# EAGLE board Master_Micro_Circuit_Manual (EAGLE 9.3.0)
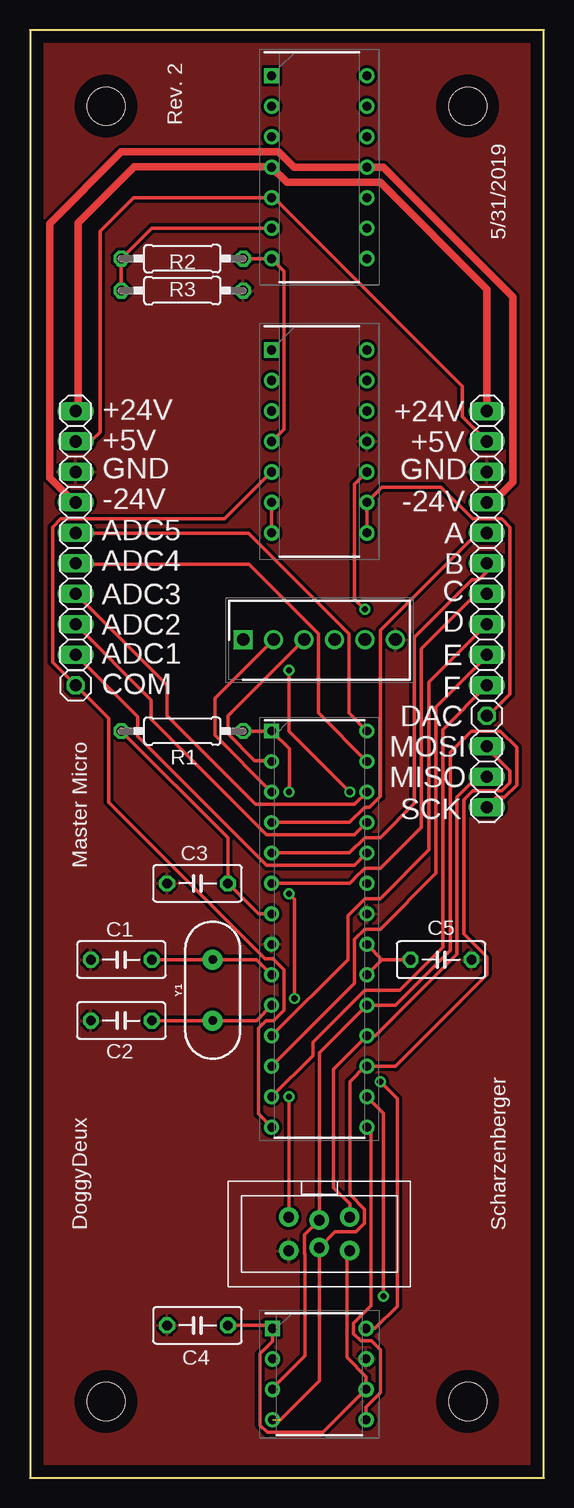
[diagram p0: board, top side]
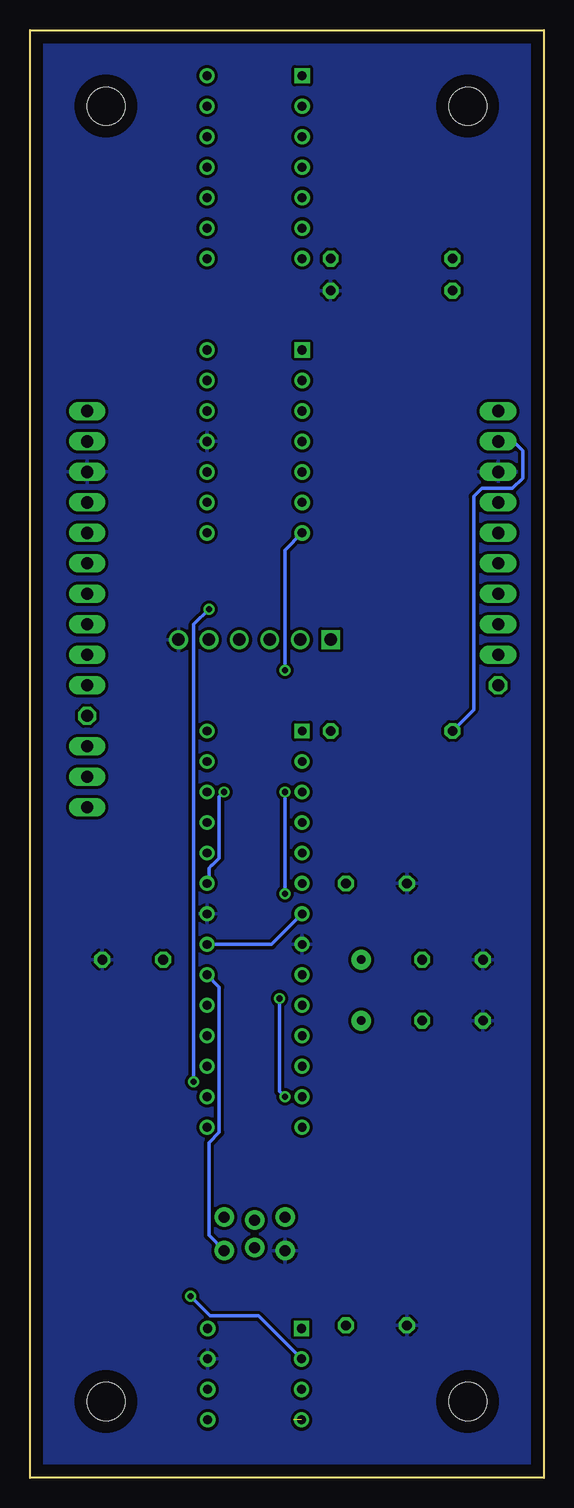
[diagram p1: board, bottom side, seen from below]

Size 42.86 x 120.65 mm. Coordinates in mm from the lower left corner, seen from the top.
Outline: 0,0 42.86,0 42.86,120.65 0,120.65 0,0
Copper layers (1*16): Top 0.035mm / dielectric 1.5mm / Bottom 0.035mm
Design rules "default": minimum track width 6mil, minimum drill 0.35mm, track to track 6mil, track to pad 6mil, pad to pad 6mil, via to via 6mil, smd to smd 6mil, copper to edge 40mil, drill to drill 6mil, minimum pad ring 10mil, minimum via ring 8mil, stop-mask expansion 4mil, vias tented up to drill 0mil, thermal gap 10mil
Net classes: 0 default: width 0.305 mm, drill 0.508 mm, clearance 0.254 mm
Holes 3.17 mm at 6.35,6.35 36.51,6.35 6.35,114.3 36.51,114.3

## Footprints (pad centres in the part's own frame; a part is rotated, then mirrored left to right if it is on the bottom)
C050-030X075 = drill 0.813 octagon: 1 -2.54,0; 2 2.54,0
DIP794W53P254L3467H457Q28N = drill 0.733 pad 1.133 square: 1 -3.969,16.51 | drill 0.733 pad 1.133: 2 -3.969,13.97; 3 -3.969,11.43; 4 -3.969,8.89; 5 -3.969,6.35; 6 -3.969,3.81; 7 -3.969,1.27; 8 -3.969,-1.27; 9 -3.969,-3.81; 10 -3.969,-6.35; 11 -3.969,-8.89; 12 -3.969,-11.43; 13 -3.969,-13.97; 14 -3.969,-16.51; 15 3.969,-16.51; 16 3.969,-13.97; 17 3.969,-11.43; 18 3.969,-8.89; 19 3.969,-6.35; 20 3.969,-3.81; 21 3.969,-1.27; 22 3.969,1.27; 23 3.969,3.81; 24 3.969,6.35; 25 3.969,8.89; 26 3.969,11.43; 27 3.969,13.97; 28 3.969,16.51
DIP794W56P254L1905H533Q14N = drill 0.759 pad 1.159 square: 1 -3.969,7.62 | drill 0.759 pad 1.159: 2 -3.969,5.08; 3 -3.969,2.54; 4 -3.969,0; 5 -3.969,-2.54; 6 -3.969,-5.08; 7 -3.969,-7.62; 8 3.969,-7.62; 9 3.969,-5.08; 10 3.969,-2.54; 11 3.969,0; 12 3.969,2.54; 13 3.969,5.08; 14 3.969,7.62
DIP781W56P254L950H533Q8N = drill 0.759 pad 1.159 square: 1 -3.905,3.81 | drill 0.759 pad 1.159: 2 -3.905,1.27; 3 -3.905,-1.27; 4 -3.905,-3.81; 5 3.905,-3.81; 6 3.905,-1.27; 7 3.905,1.27; 8 3.905,3.81
AVRISP-BOX = drill 0.9 pad 1.626: 1 -1.397,2.54; 2 1.397,2.54; 3 -1.143,0; 4 1.143,0; 5 -1.397,-2.54; 6 1.397,-2.54
SHDR6W87P0X254_1X6_1509X635X10 = drill 1.05 pad 1.575 square: 1 0,0 | drill 1.05 pad 1.575: 2 2.54,0; 3 5.08,0; 4 7.62,0; 5 10.16,0; 6 12.7,0
1X04 = drill 1.016 long: 1 -3.81,0; 2 -1.27,0; 3 1.27,0; 4 3.81,0
1X05 = drill 1.016 long: 1 -5.08,0; 2 -2.54,0; 3 0,0; 4 2.54,0; 5 5.08,0
1X01 = drill 1.016 octagon: 1 0,0
1X06 = drill 1.016 long: 1 -6.35,0; 2 -3.81,0; 3 -1.27,0; 4 1.27,0; 5 3.81,0; 6 6.35,0
1X03 = drill 1.016 long: 1 -2.54,0; 2 0,0; 3 2.54,0
0207/10 = drill 0.813 octagon: 1 -5.08,0; 2 5.08,0
HC49US = drill 0.7 pad 1.651: 1 -2.54,0; 2 2.54,0

## Placement (x,y rotation side)
C1  [C050-030X075]  7.62,43.18 180 top
C2  [C050-030X075]  7.62,38.1 180 top
C3  [C050-030X075]  13.97,49.53 180 top
C4  [C050-030X075]  13.97,12.7 180 top
C5  [C050-030X075]  34.29,43.18 0 top
IC1  ATMEGA88A-PU  [DIP794W53P254L3467H457Q28N]  24.13,45.72 0 top
IC2  LM324N  [DIP794W56P254L1905H533Q14N]  24.13,109.22 0 top
IC3  LM324N  [DIP794W56P254L1905H533Q14N]  24.13,86.36 0 top
IC4  MCP4921-E_P  [DIP781W56P254L950H533Q8N]  24.13,8.64 0 top
ISP1  AVRISP-BOX  [AVRISP-BOX]  24.13,20.32 270 top
J1  22-23-2061  [SHDR6W87P0X254_1X6_1509X635X10]  17.78,69.85 0 top
JP1  [1X04]  3.81,85.09 270 top
JP2  [1X05]  3.81,73.66 270 top
JP3  [1X01]  3.81,66.04 0 top
JP4  [1X04]  38.1,85.09 270 top
JP5  [1X06]  38.1,72.39 270 top
JP6  [1X01]  38.1,63.5 0 top
JP7  [1X03]  38.1,58.42 270 top
R1  [0207/10]  12.7,62.23 0 top
R2  [0207/10]  12.7,98.93 0 top
R3  [0207/10]  12.7,101.6 0 top
Y1  16MHz  [HC49US]  15.24,40.64 90 top

## Library data of the parts
C1-C5 ISP1 = adafruit
IC1 = SamacSys_Parts; DESCRIPTION: ATMEGA88A-PU, 8 bit AVR Microcontroller 20MHz 512 B, 8 kB Flash, 1 kB RAM, I2C 28-Pin PDIP; HEIGHT: 4.572mm; MANUFACTURER_NAME: Microchip; MANUFACTURER_PART_NUMBER: ATMEGA88A-PU; MOUSER_PART_NUMBER: 556-ATMEGA88A-PU
IC2 IC3 = SamacSys_Parts; DESCRIPTION: OP Amp Quad GP 16V/32V 14-Pin PDIP Texas Instruments LM324N, Quad Op Amp, 1.2MHz, 5 28 V, 14-Pin PDIP; HEIGHT: 5.334mm; MANUFACTURER_NAME: Texas Instruments; MANUFACTURER_PART_NUMBER: LM324N; MOUSER_PART_NUMBER: 595-LM324N
IC4 = SamacSys_Parts; DESCRIPTION: Microchip MCP4921-E/P, 12 bit Serial DAC, 8-Pin PDIP; HEIGHT: 5.334mm; MANUFACTURER_NAME: Microchip; MANUFACTURER_PART_NUMBER: MCP4921-E/P; MOUSER_PART_NUMBER: 579-MCP4921-E/P
J1 = SamacSys_Parts; DESCRIPTION: 2.54mm,header,KK,vert,Sn,frictn lock,6w Molex KK 254 Series, Series Number 6373, 2.54mm Pitch 6 Way 1 Row Straight PCB Header, Through Hole, Solder Termination; HEIGHT: 10.67mm; MANUFACTURER_NAME: Molex; MANUFACTURER_PART_NUMBER: 22-23-2061; MOUSER_PART_NUMBER: 538-22-23-2061
JP1-JP7 = pinhead
R1-R3 = rcl; SPICEPREFIX: R
Y1 = SparkFun-Clocks; PROD_ID: XTAL-08181; SF_ID: COM-00536

## Nets
+5V: C3.1 C4.1 C5.1 IC1.7 IC1.20 IC1.21 IC2.5 IC4.1 IC4.6 ISP1.2 JP1.2 JP4.2 R1.1
+24V: IC2.4 JP1.1 JP4.1
-24V: IC2.11 JP1.4 JP4.4
A: IC1.4 JP5.1
ADC: IC1.23 IC3.6 IC3.7
B: IC1.5 JP5.2
C: IC1.6 JP5.3
CS: IC1.16 IC4.2
D: IC1.11 JP5.4
DAC: IC3.10 IC4.8
DEMUX_COM: IC3.8 IC3.9 JP6.1
E: IC1.12 JP5.5
F: IC1.13 JP5.6
GND: C1.2 C2.2 C3.2 C4.2 C5.2 IC1.8 IC1.22 IC3.11 IC4.7 ISP1.6 J1.6 JP1.3 JP4.3 R2.2
MISO: IC1.18 ISP1.1 JP7.2
MOSI: IC1.17 IC4.4 ISP1.4 JP7.1
MUX_COM: IC1.14 IC3.5 JP3.1
N$1: C2.1 IC1.10 Y1.1
N$5: IC1.15 IC4.5
N$6: IC2.6 R2.1 R3.1
N$11: C1.1 IC1.9 Y1.2
N$14: IC2.7 IC3.4 R3.2
PC1: IC1.24 JP2.5
PC2: IC1.25 JP2.4
PC3: IC1.26 JP2.3
PC4: IC1.27 JP2.2
PC5: IC1.28 JP2.1
RESET: IC1.1 ISP1.5 R1.2
RX: IC1.2 J1.3
SCK: IC1.19 IC4.3 ISP1.3 JP7.3
TX: IC1.3 J1.2

## Tracks (layer width: path | path; a pad name or v marks a point on that pad's centre or on a via)
+5V
  Top 0.305: C4.1 19.97,12.7 IC4.1 20.23,11.38 19.18,10.34 19.18,4.39 19.79,3.79 24.45,3.79 IC4.6 28.04,8.44 26.44,10.03 26.44,18.69 ISP1.2 | IC1.21 29.37,43.18 | 29.37,43.18 C5.1 | IC1.20 29.37,43.18 | IC1.7 19.05,46.99 C3.1 16.51,53.34 R1.1 | JP1.2 5.08,86.36 5.84,87.12 5.84,103.87 8.65,106.68 IC2.5 20.36,106.68 36.06,90.98 36.06,88.4 JP4.2
  Bottom 0.305: IC1.21 22.7,44.45 IC1.7 | R1.1 5.84,64.01 5.84,81.79 5.18,82.45 2.64,82.45 1.78,83.31 1.78,85.6 2.54,86.36 JP1.2 | ISP1.2 27.94,20.19 27.94,27.92 27.07,28.79 27.07,40.88 IC1.20
+24V
  Top 0.305: IC2.4 20.11,109.27
  Top 0.61: JP1.1 4.01,89.1 4.01,104.58 8.7,109.27 20.11,109.27 | JP4.1 38.1,99.06 29.21,107.95 21.43,107.95 IC2.4
-24V
  Top 0.61: JP1.4 3.68,81.28 1.63,83.34 1.63,104.5 7.62,110.49 20.73,110.49 22,109.22 IC2.11 29.46,109.22 40.28,98.4 40.28,82.96 38.61,81.28 JP4.4
A
  Top 0.305: IC1.4 26.65,54.61 27.93,55.89 28.33,55.89 29.23,56.79 29.23,70.64 37.34,78.74 JP5.1
ADC  (via drill 0.51)
  Top 0.305: IC3.6 IC3.7 | v21.59,67.31 21.59,62.23 v26.67,57.15
  Bottom 0.305: IC3.7 21.59,77.31 v21.59,67.31 | v26.67,57.15 27.07,56.75 27.07,51.65 27.67,51.04 27.7,51.04 27.94,50.8 27.94,49.69 IC1.23
B
  Top 0.305: IC1.5 26.65,52.07 27.92,53.34 29.21,53.34 32.08,56.21 32.08,70.06 36.85,74.83 37.44,74.83 38.1,75.49 JP5.2
C
  Top 0.305: IC1.6 26.67,49.53 27.07,49.93 27.07,49.95 27.92,50.8 29.21,50.8 32.64,54.23 32.64,69.09 37.21,73.66 JP5.3
CS  (via drill 0.51)
  Top 0.305: IC1.16 29.46,30.39 v29.46,15.11
  Bottom 0.305: IC4.2 23.8,13.49 27.84,13.49 v29.46,15.11
D
  Top 0.305: IC1.11 26.51,43.18 26.51,46.86 27.92,48.26 29.21,48.26 33.27,52.32 33.27,66.29 JP5.4
DAC  (via drill 0.51)
  Top 0.305: v29.21,33.02 30.63,31.6 30.63,14.29 28.79,12.45 IC4.8 | v27.94,72.39 27.9,72.39 27.06,73.23 27.06,82.78 IC3.10
  Bottom 0.305: v29.21,33.02 29.21,71.12 v27.94,72.39
DEMUX_COM
  Top 0.305: IC3.8 IC3.9 29.37,82.55 34.29,82.55 36.93,79.91 39.35,79.91 40.03,79.22 40.03,65.31 38.23,63.5 JP6.1
E
  Top 0.305: IC1.12 27.07,41.2 27.07,44.88 27.92,45.72 29.21,45.72 33.86,50.37 33.86,64.21 38.1,68.45 JP5.5
F
  Top 0.305: IC1.13 23.59,35.18 23.59,36.32 27.92,40.64 30.86,40.64 34.42,44.2 34.42,62.36 JP5.6
GND
  pour Top: -1.27,121.92 -1.27,-1.27 44.45,-1.27 44.45,121.92
  pour Bottom: -1.27,121.92 -1.27,-1.27 44.51,-1.27 44.51,121.92
MISO
  Top 0.305: ISP1.1 26.67,22.82 25.32,24.17 25.32,34.05 IC1.18 28.83,36.83 35.61,43.61 35.61,56.72 36.7,57.81 37.49,57.81 JP7.2
MOSI  (1 unrouted)
  Top 0.305: 20.89,4.83 24.13,8.07 ISP1.4 25.45,20.5 27.18,20.5 27.89,21.21 27.89,22.39 26.67,23.61 26.67,33.02 27.94,34.29 IC1.17 30.48,34.29 38.1,41.91 38.1,43.42 36.17,45.35 36.17,56.49 36.93,57.25 39.35,57.25 40.03,57.94 40.03,58.9 38.1,60.83 JP7.1
MUX_COM
  Top 0.305: IC3.5 16.25,79.91 2.56,79.91 1.88,79.22 1.88,67.97 JP3.1 6.55,63.3 6.55,56.31 19.61,43.25 20.27,43.25 21.19,42.34 21.19,38.95 20.33,38.09 19.67,38.09 19.05,37.47 19.05,30.32 IC1.14
N$1
  Top 0.305: IC1.10 18.89,38.1 Y1.1 C2.1
N$5
  Top 0.305: IC1.15 28.45,28.86 28.45,14.33 27,12.88 27,12.02 27.6,11.41 28.47,11.41 29.21,10.66 29.21,7.07 28.04,5.89 IC4.5
N$6
  Top 0.305: IC2.6 10.16,104.14 R3.1 R2.1
N$11
  Top 0.305: IC1.9 18.89,43.18 Y1.2 C1.1
N$14
  Top 0.305: R3.2 IC2.7 21.2,100.56 21.2,87.4 IC3.4
PC1
  Top 0.305: IC1.24 28.07,52.07 27.05,51.04 19.74,51.04 8.97,61.8 8.97,63.42 JP2.5
PC2
  Top 0.305: IC1.25 28.07,54.61 27.05,53.58 19.74,53.58 10.12,63.2 10.12,64.81 JP2.4
PC3
  Top 0.305: JP2.3 11.43,66.04 11.43,63.5 18.81,56.12 27.06,56.12 IC1.26
PC4
  Top 0.305: JP2.2 3.89,76.12 18.27,76.12 24.05,70.34 24.05,63.73 IC1.27
PC5
  Top 0.305: JP2.1 3.83,78.72 18.22,78.72 26.59,70.34 26.59,63.73 IC1.28
RESET  (via drill 0.51)
  Top 0.305: R1.2 IC1.1 21.64,60.75 21.64,57.2 v21.59,57.15 | ISP1.5 v21.59,31.75 | v22.05,39.94 22.05,48.2 v21.59,48.67
  Bottom 0.305: v21.59,31.75 22.05,32.21 v22.05,39.94 | v21.59,48.67 v21.59,57.15
RX
  Top 0.305: J1.3 16.51,63.5 16.51,61.99 18.73,59.77 20.09,59.77 IC1.2
SCK
  Top 0.305: IC4.3 20.23,7.46 22.92,10.16 22.92,18.66 22.91,18.67 22.91,20.24 ISP1.3 24.15,21.48 24.15,35.42 IC1.19 30.48,39.37 35.05,43.94 35.05,60.45 36.83,62.23 39.24,62.23 40.59,60.88 40.59,57.7 39.58,56.69 38.91,56.69 JP7.3
TX
  Top 0.305: J1.2 15.44,64.97 15.44,61.87 IC1.3

## Text on the board
tPlace: Rev. 2 | 5/31/2019 | +24V | +24V | +5V | +5V | GND | GND | -24V | -24V | ADC5 | A | ADC4 | B | ADC3 | C | ADC2 | D | ADC1 | E | COM | F | DAC | MOSI | MISO | SCK | Master Micro | DoggyDeux | Scharzenberger